# Altium PCB ADL5801.PcbDoc
Units mil, origin at the board's own origin, x right, y up, seen from the top; angles counter-clockwise.
Board outline 1370 x 1080 mil, 4 copper layers (Top Layer, Layer 1, Layer 2, Bottom Layer), stack 23.756 mil thick; 32 components, 21 nets, 114 pads, 117 vias.
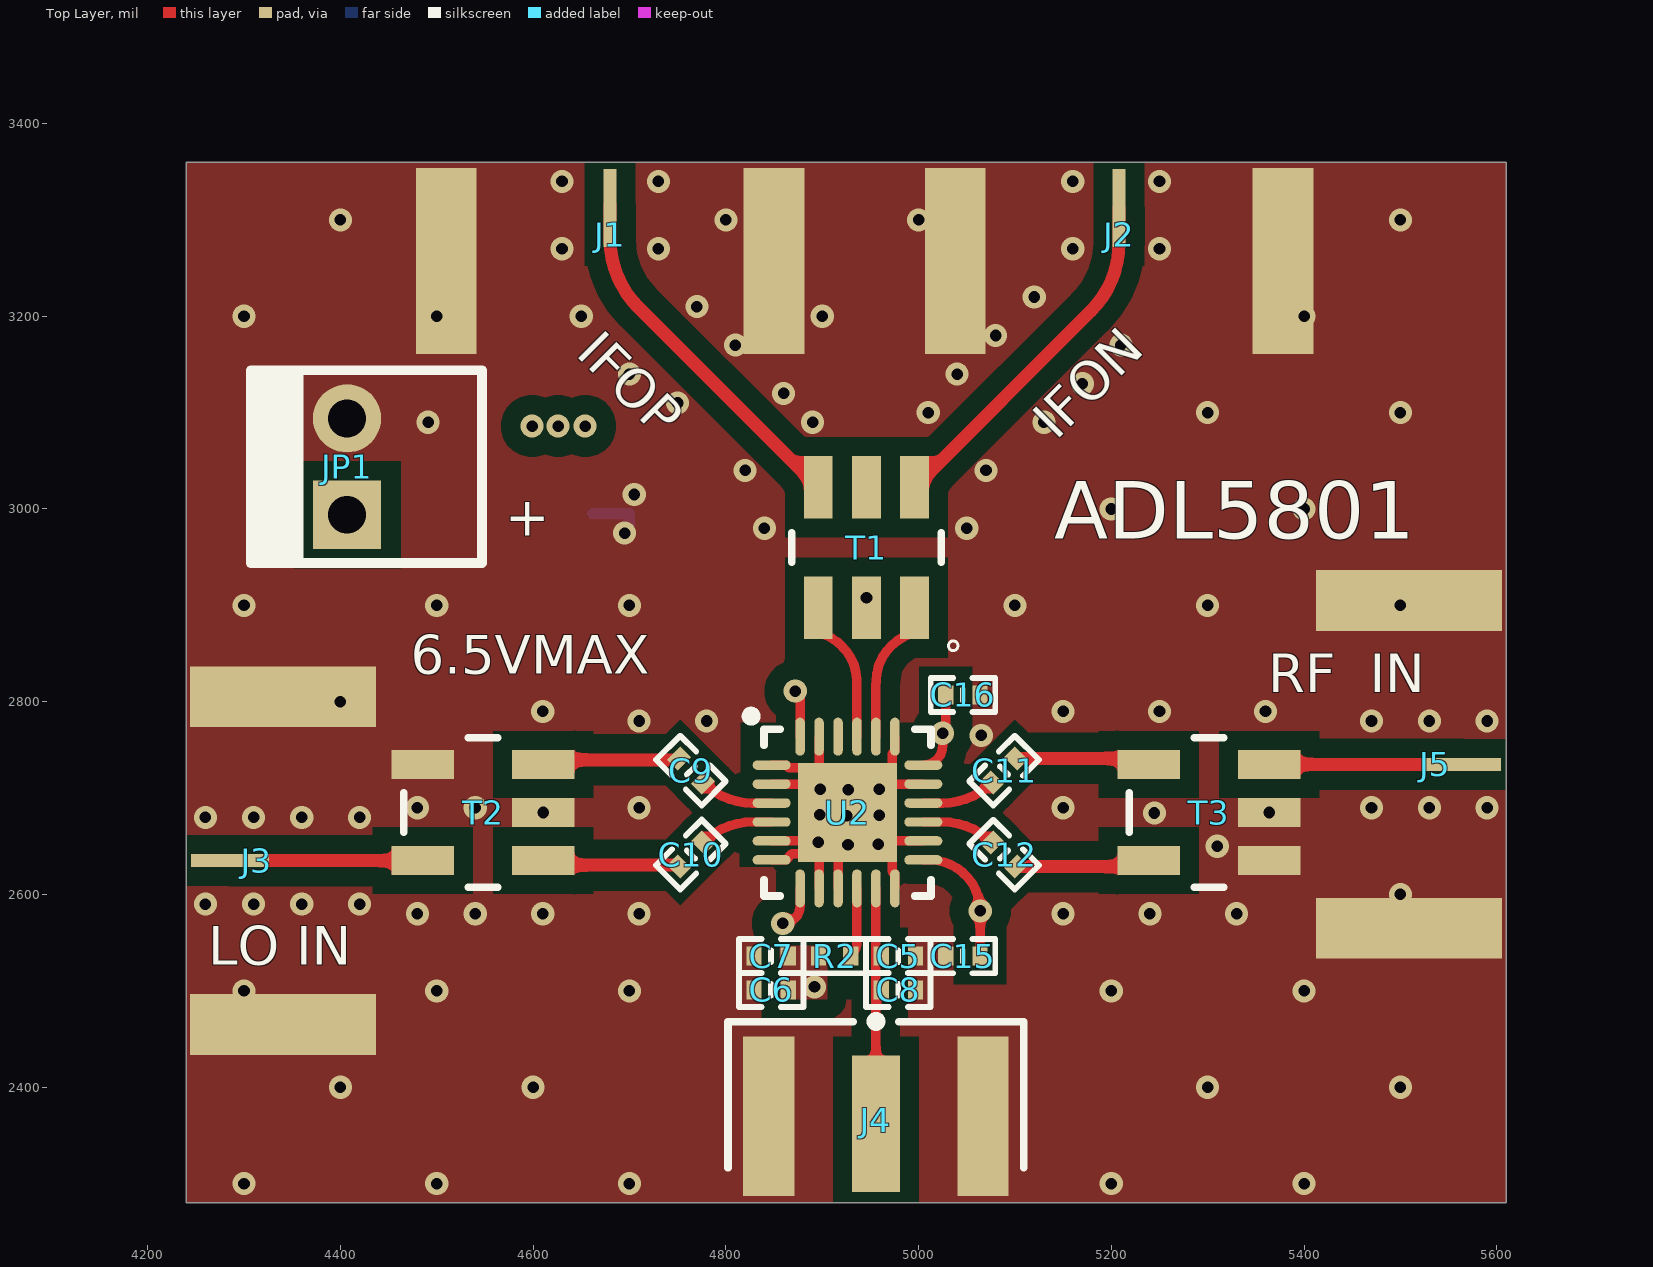
[diagram p0: Top Layer view]
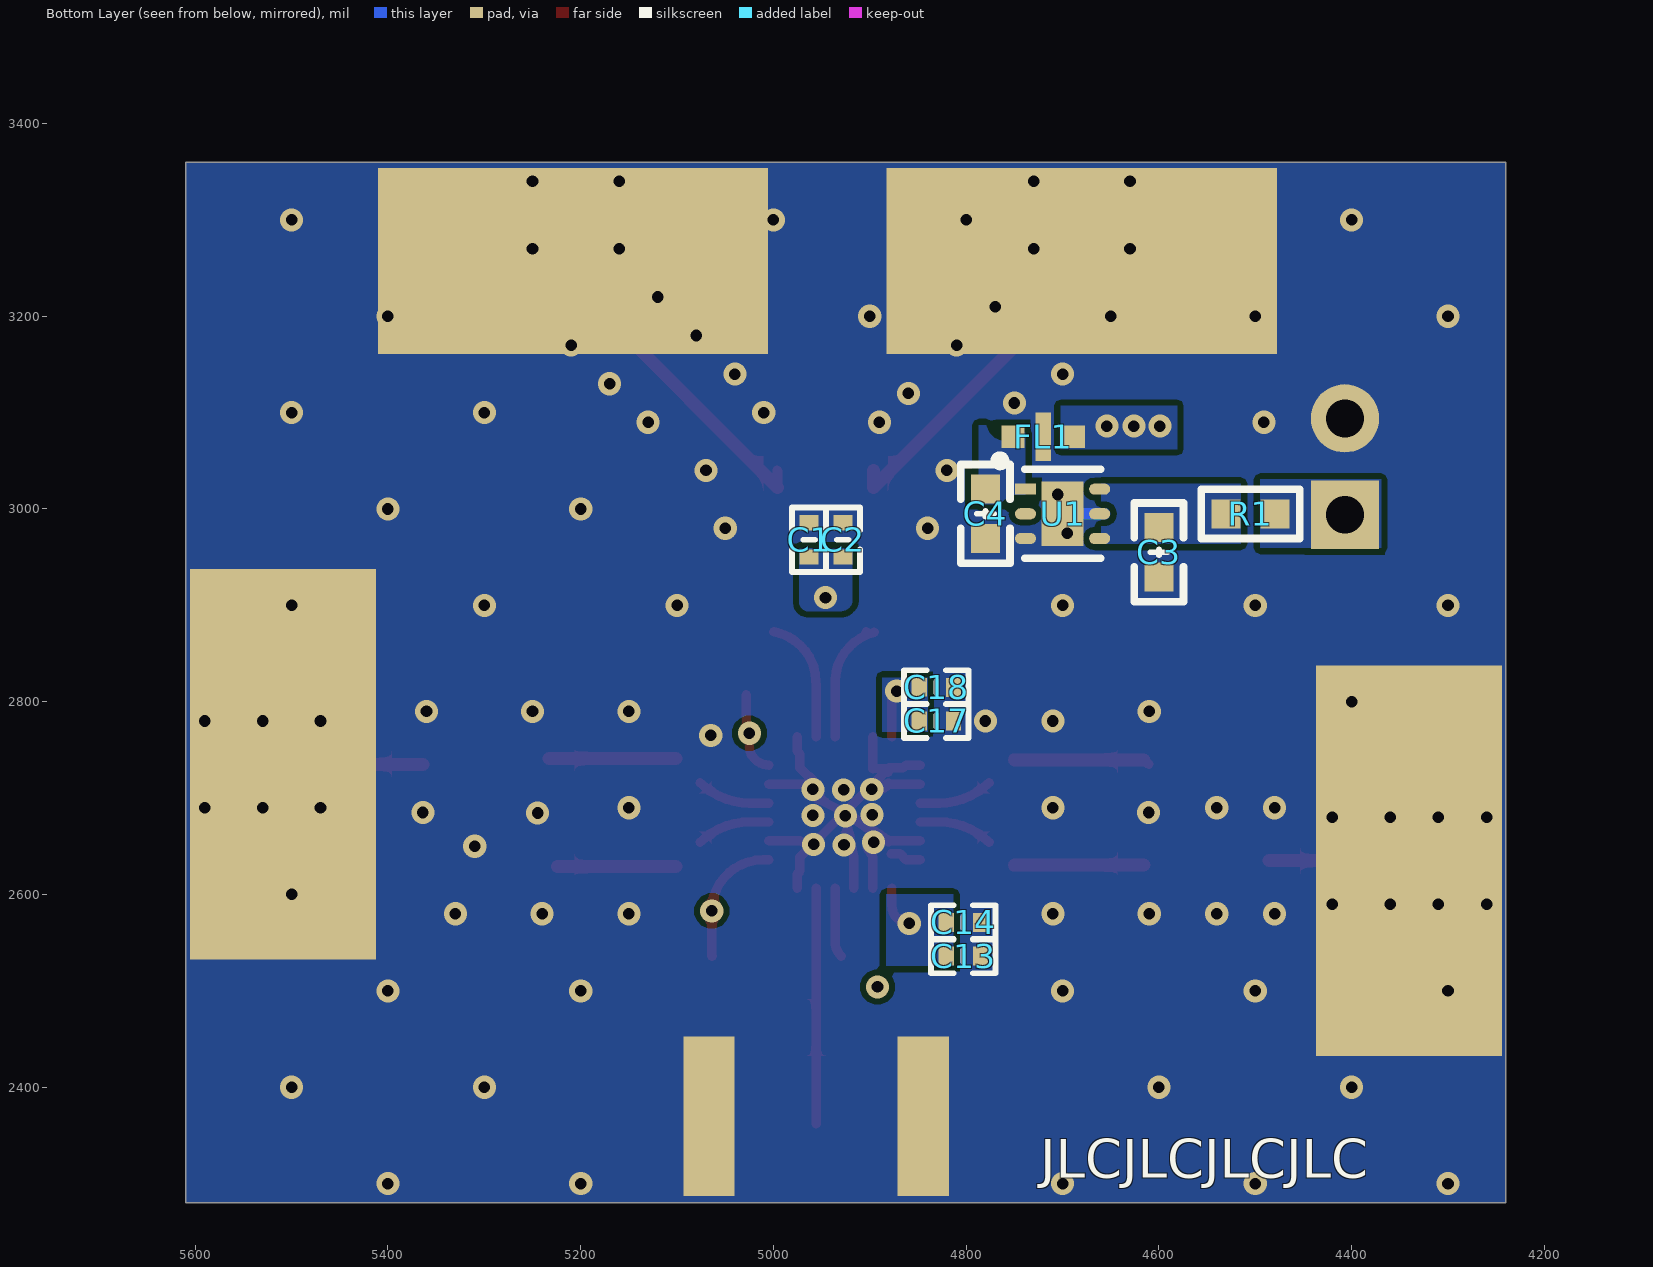
[diagram p1: Bottom Layer view, seen from below]
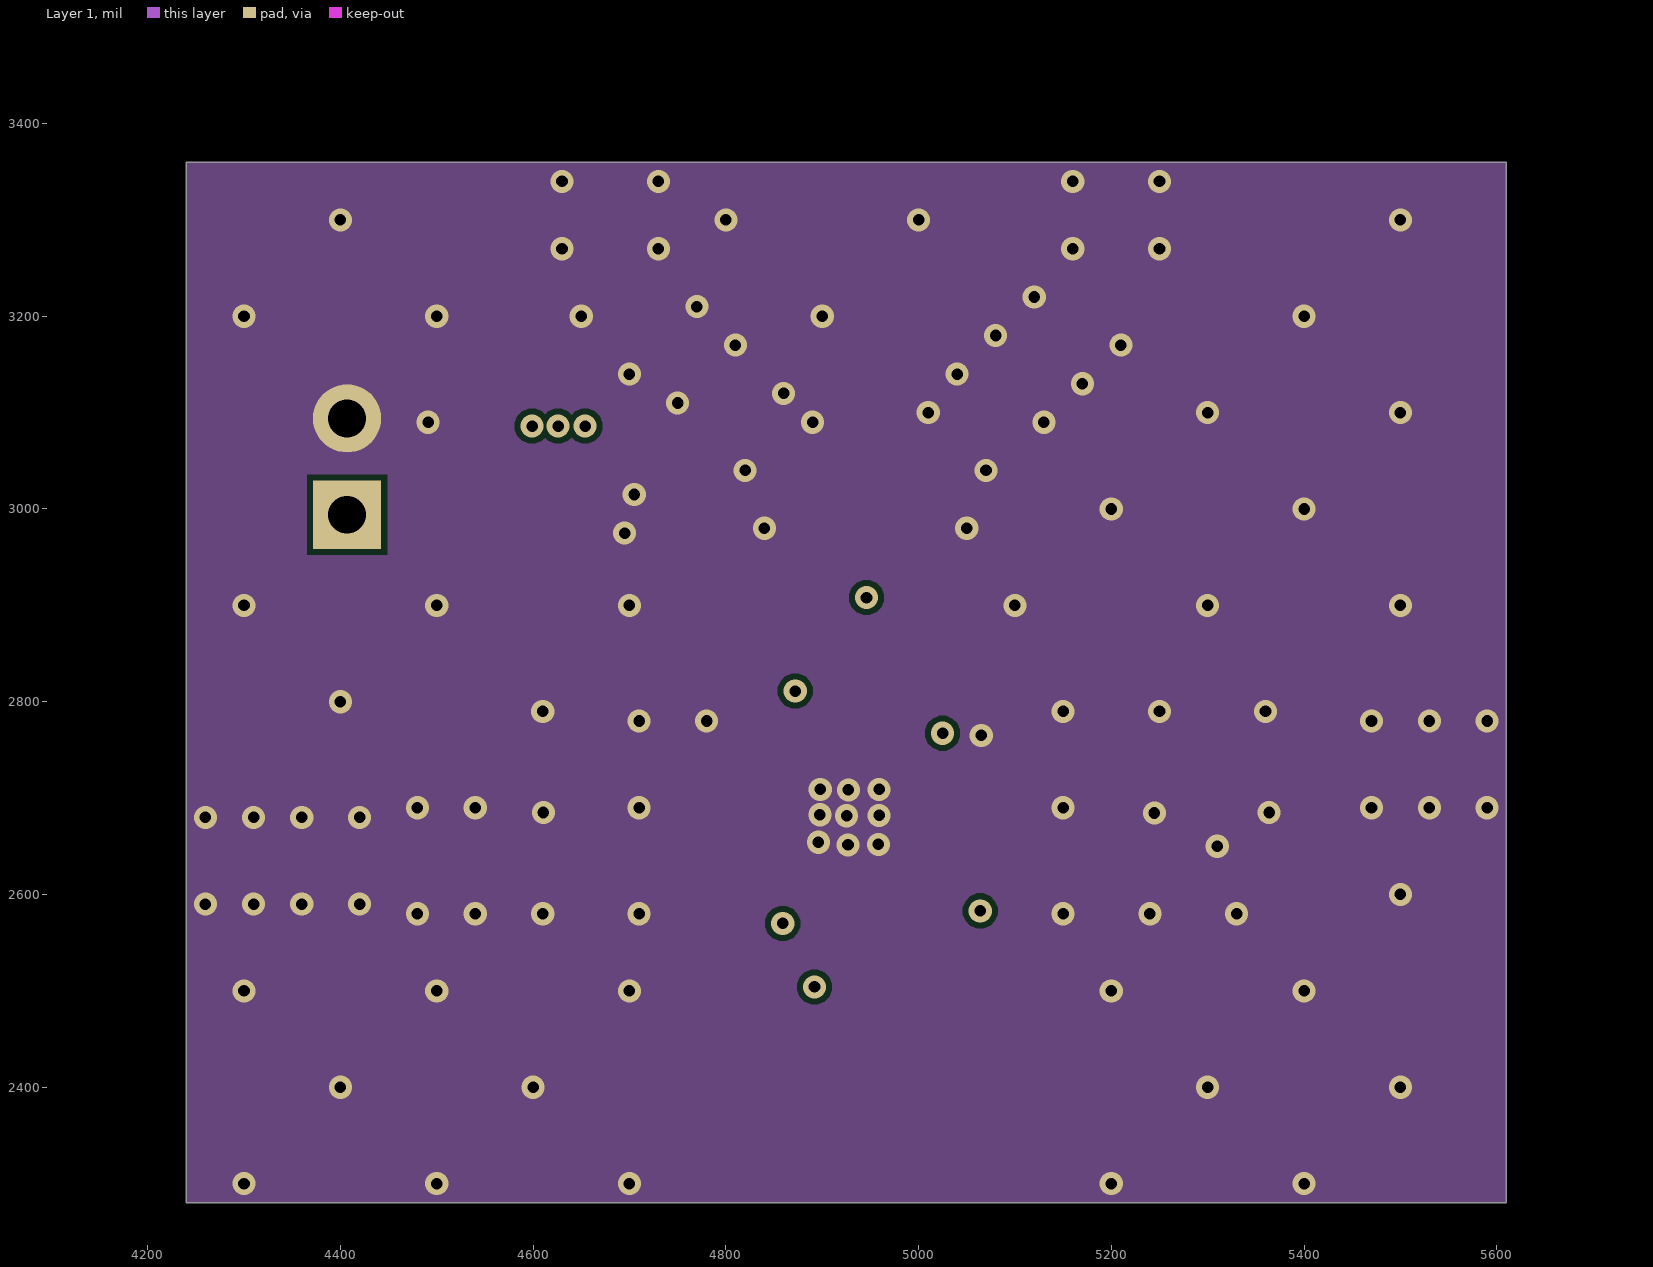
[diagram p2: Layer 1]
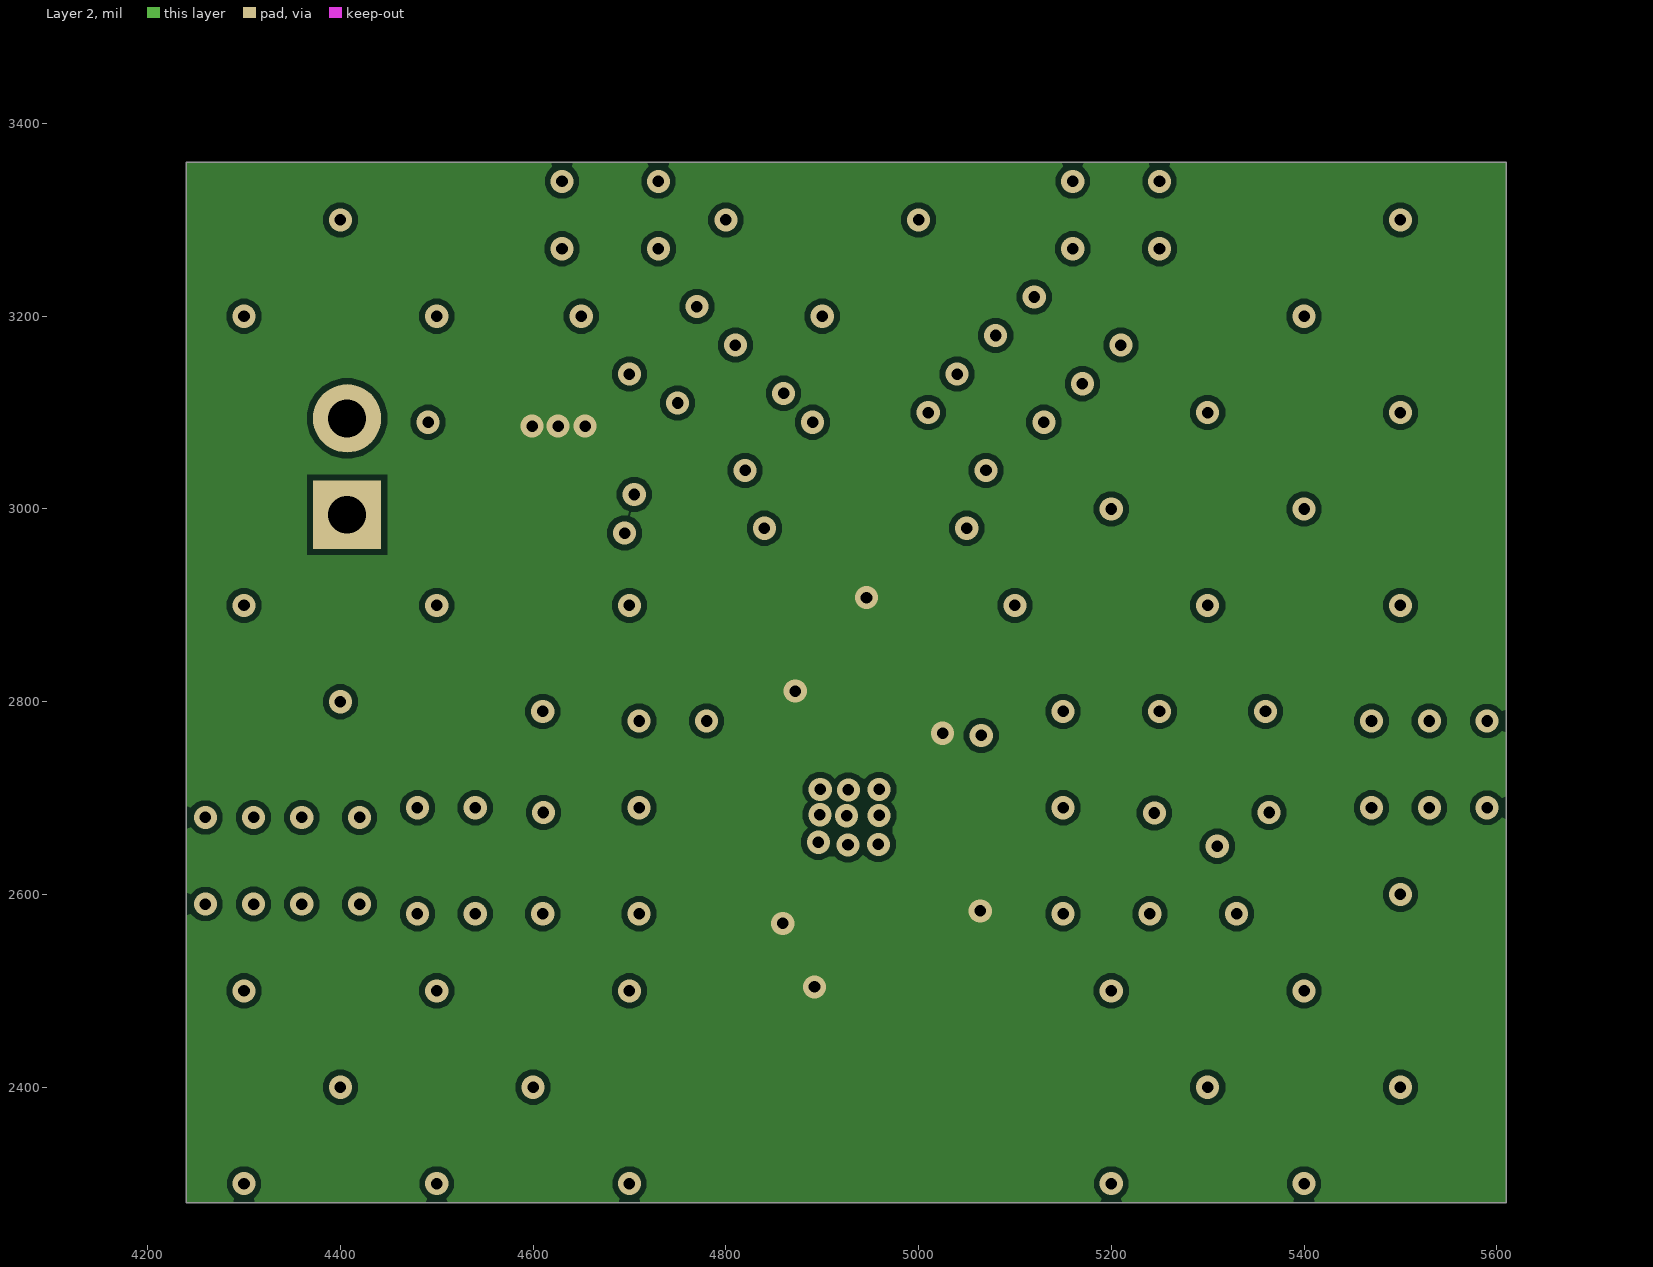
[diagram p3: Layer 2]
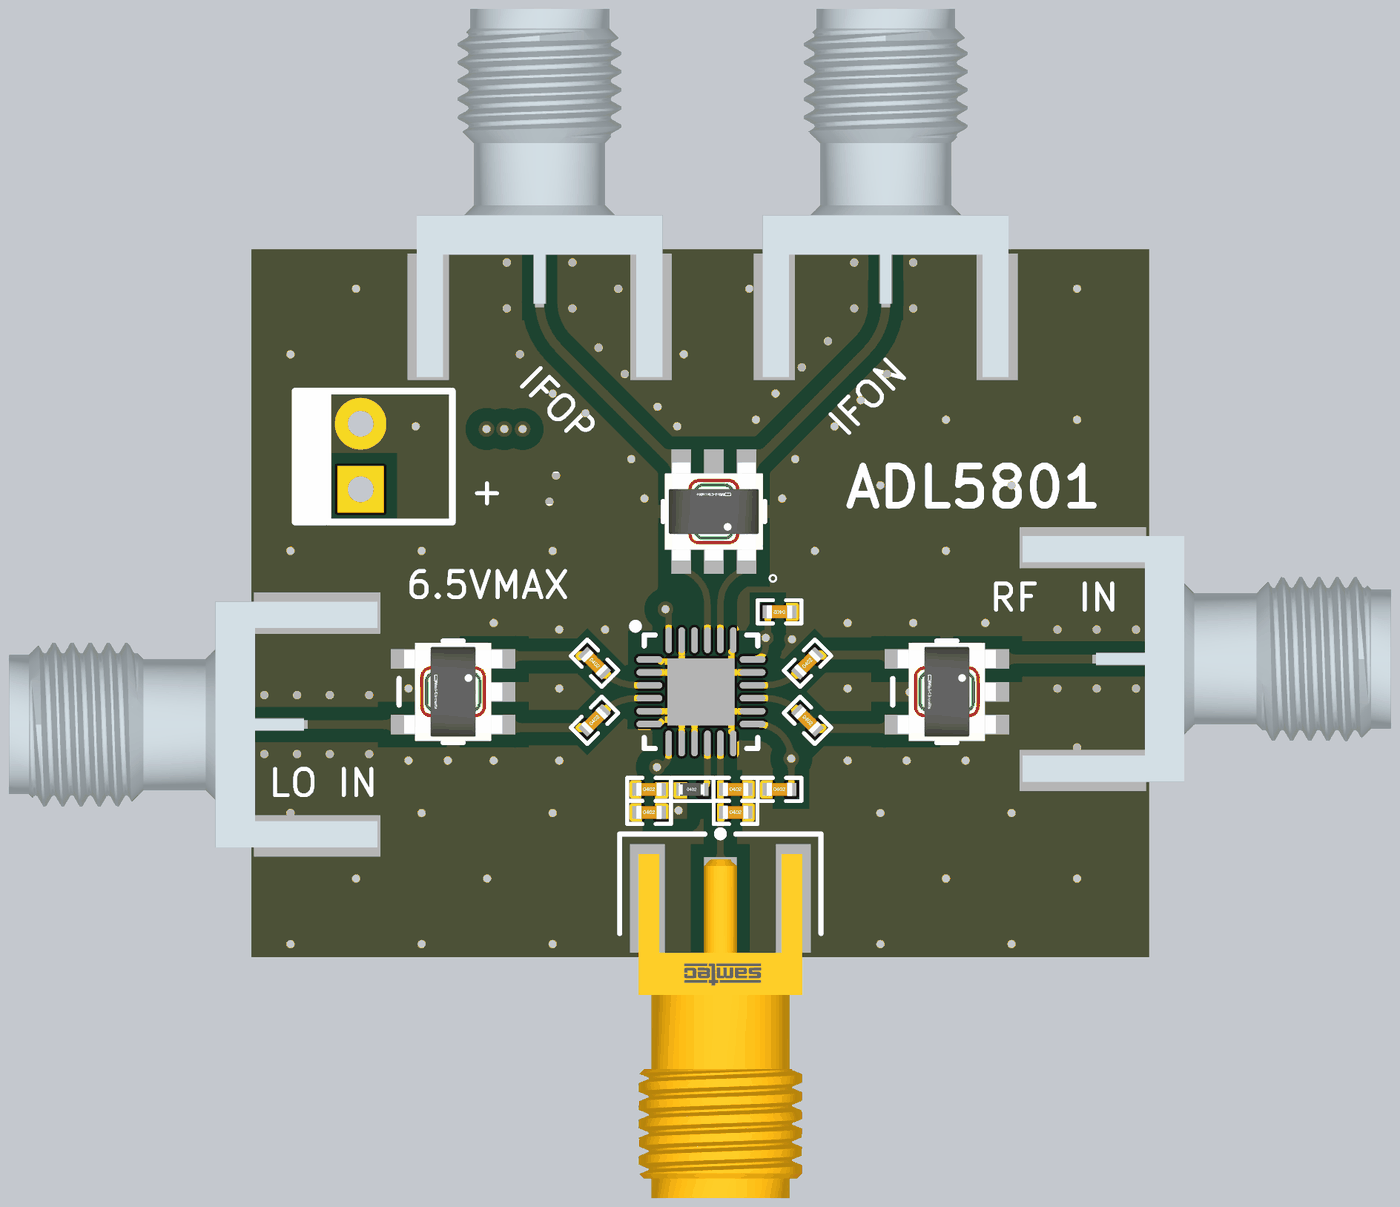
[diagram p4: 3D render of the assembled board from above, using the file's embedded part models]
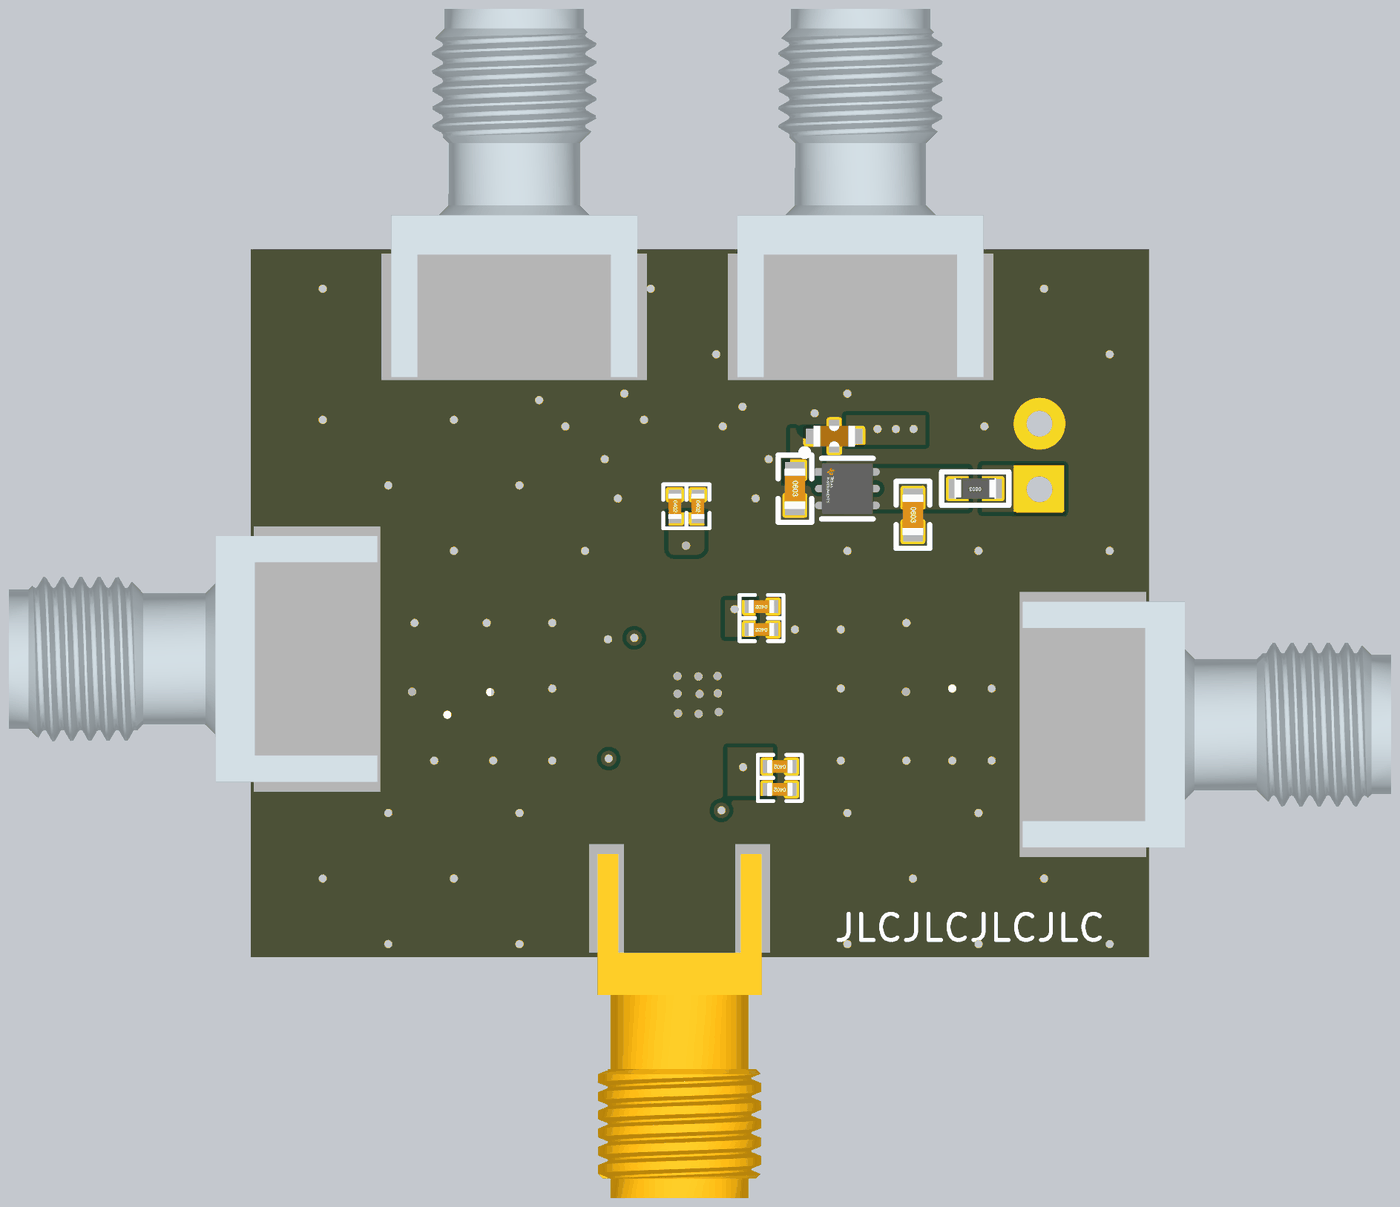
[diagram p5: 3D render of the assembled board from below, using the file's embedded part models]

## Layer stack, top to bottom
Top Solder: solder mask 0.4, Solder Resist, Dk 3.5
Top Layer: signal copper 1.4
Dielectric 2: prepreg 2.8, PP-006, Dk 4.1
Layer 1: signal copper 1.378
Dielectric 1: dielectric 12.6, FR-4, Dk 4.8
Layer 2: signal copper 1.378
Dielectric 3: prepreg 2.8, PP-006, Dk 4.1
Bottom Layer: signal copper 1.4
Bottom Solder: solder mask 0.4, Solder Resist, Dk 3.5

## Board outline
4240,2280 5610,2280 5610,3360 4240,3360

## Design rules (kind name [scope] priority, off if disabled: settings)
Clearance [All] p1: gap=6 ignorepadtopadclearanceinfootprint=TRUE
DiffPairsRouting [All] p1: maxlimit=10 minlimit=99999 mostfreqgap=10 toplayer_mingap=0 toplayer_minwidth=9.84 toplayer_maxwidth=15 toplayer_prefwidth=15 midlayer1_mingap=0 midlayer1_minwidth=9.84 midlayer1_maxwidth=15 midlayer1_prefwidth=15 midlayer2_mingap=0 midlayer2_minwidth=9.84 midlayer2_maxwidth=15 midlayer2_prefwidth=15 bottomlayer_mingap=0 bottomlayer_minwidth=9.84 bottomlayer_maxwidth=15 bottomlayer_prefwidth=15 maxuncoupledlength=500
PlaneConnect [All] p1: planeconnectstyle=Direct reliefexpansion=20 reliefentries=4 reliefconductorwidth=10 reliefairgap=10
PolygonConnect [All] p1: connectstyle=Direct reliefconductorwidth=10 reliefentries=4 polygonreliefangle="90 Angle" airgapwidth=10
RoutingVias [All] p1: holewidth=28 width=50 viastyle="Through Hole" minholewidth=28 minwidth=50 maxholewidth=28 maxwidth=50
SolderMaskExpansion [All] p1: expansion=4 istentingtop=FALSE
Width [All] p1: maxlimit=20 minlimit=9.85 preferedwidth=13.48
28 further rules are at their usual default settings.

## Classes and differential pairs
differential pair RFI: +RFI_P -RFI_N
differential pair LOI: +LOI_P -LOI_N
differential pair IFO: +IFO_P -IFO_N

## Components (designator, comment, footprint, x,y, rotation, side; value= is the part's Value field where it differs from the comment)
C1 "100nF" "C 0402_L" 4963,2968 r270 bottom
C2 "100pF" "C 0402_L" 4928,2968 r270 bottom
C3 "1uF" "C 0603_L" 4600,2955 r270 bottom
C4 "4.7uF" "C 0603_L" 4780,2995 r270 bottom
C5 "100nF" "C 0402_L" 4979,2536 r0 top
C6 "100nF" "C 0402_L" 4847,2501 r0 top
C7 "100pF" "C 0402_L" 4847,2536 r0 top
C8 "100pF" "C 0402_L" 4979,2501 r0 top
C9 "470pF" "C 0402_L" 4763.77,2728.61 r315 top
C10 "470pF" "C 0402_L" 4763.77,2641.45 r45 top
C11 "470pF" "C 0402_L" 5088.73,2728.61 r45 top
C12 "470pF" "C 0402_L" 5088.73,2641.44 r315 top
C13 "100nF" "C 0402_L" 4803,2536 r0 bottom
C14 "100pF" "C 0402_L" 4803,2571 r0 bottom
C15 "100nF" "C 0402_L" 5046,2536 r0 top
C16 "100nF" "C 0402_L" 5046,2807 r180 top
C17 "100nF" "C 0402_L" 4831,2780 r0 bottom
C18 "100pF" "C 0402_L" 4831,2814.99 r0 bottom
FL1 "NFM18CC223R1C3D" FIL_NFM18CC223R1C3D 4720,3075 r180 bottom (schematic designator FL?)
J1 "132414" CONN_132414_AMP 4680,3457.15 r0 top
J2 "132414" CONN_132414_AMP 5208.07,3457.16 r0 top
J3 "132414" CONN_132414_AMP 4140.65,2635.03 r90 top
J4 "SMA-J-P-H-ST-EM1" FP-SMA-J-P-H-ST-EM1-MFG 4955.78,2099.74 r0 top
J5 "132414" CONN_132414_AMP 5708.75,2735.03 r270 top
JP1 "HDR-1X2" KF2510-LI-2P 4407,3044 r90 top
R1 "120欧磁珠" "R 0603_L" 4505,2995 r0 bottom
R2 "560" "R 0402_L" 4912,2536 r0 top
T1 "TC4-1T+" TC4-1T+-Footprint-1 4945.94,2958.03 r180 top
T2 "TC1-1-13M+" FP-TC1-1-13M+-MFG 4548.15,2685.03 r270 top
T3 "TC1-1-13M+" FP-TC1-1-13M+-MFG 5301.25,2685.03 r270 top
U1 "LP5912-5.0DRVT" FP-DRV0006A-IPC_C 4700,2995 r180 bottom
U2 "ADL5801ACPZ-R7" ADI-CP-24-3_M 4926.25,2685.03 r0 top

## Footprints (in the part's own frame and the unit in brackets; to place one, negate y for a bottom-side part, rotate by r counter-clockwise, add the part's x,y. Pads: shape width x height; smd on the part's side, far side on the other; paste and mask are expansions set on the pad)
ADI-CP-24-3_M [mm] "QFN, 24-Leads, Body 4x4mm, Pitch 0.5mm, Thermal Pad 2.5x2.5mm, IPC Low Density"
  oval 1x0.25 smd: 1(-2,1.25) 2(-2,0.75) 3(-2,0.25) 4(-2,-0.25) 5(-2,-0.75) 6(-2,-1.25) 13(2,-1.25) 14(2,-0.75) 15(2,-0.25) 16(2,0.25) 17(2,0.75) 18(2,1.25)
  oval 0.25x1 smd: 7(-1.25,-2) 8(-0.75,-2) 9(-0.25,-2) 10(0.25,-2) 11(0.75,-2) 12(1.25,-2) 19(1.25,2) 20(0.75,2) 21(0.25,2) 22(-0.25,2) 23(-0.75,2) 24(-1.25,2)
  rect 2.6x2.6 smd: 25(0,0)
  silkscreen extent -2.66,-2.2 2.2,2.66, body extent -2.05,-2.05 2.05,2.05, height 1
"C 0402_L" [mm] "无极性贴片电容"
  rect 0.4x0.5 smd: 1(-0.45,0) 2(0.45,0)
  silkscreen extent -0.85,-0.45 0.85,0.45, body extent -0.5,-0.26 0.5,0.26, height 0.53
"C 0603_L" [mil] "无极性贴片电容"
  rect 30x30 smd: 1(-25.59,0) 2(25.59,0)
  silkscreen extent -51,-26 51,26, body extent -31,-16 31,16, height 32
CONN_132414_AMP [mil]
  rect 13.48x81 smd paste+0 mask+0: 1(0,-145)
  rect 63x193 smd mask+0: 2(-170,-200) 3(170,-200)
  rect 405x193 smd far side mask+0: 4(0,-200)
  body extent -188,-292 188,270, height 162
FIL_NFM18CC223R1C3D [mm]
  rect 0.6x0.6 smd: 1(-0.8,0) 3(0.8,0)
  rect 0.4x1.27 smd: 2(0,0)
  body extent -0.8,-0.4 0.8,0.4, height 0.7
FP-DRV0006A-IPC_C [mm]
  rect 0.556x0.292 smd paste+0 mask+0: 1(-0.978,0.65)
  rrect100% 0.556x0.292 smd paste+0 mask+0: 2(-0.978,0) 3(-0.978,-0.65) 4(0.978,-0.65) 5(0.978,0) 6(0.978,0.65)
  rect 1.1x1.7 smd paste-1000 mask+0: 7(0,0)
  silkscreen extent -1.78,-1.17 1,1.52, body extent -1,-1 1,1, height 0.8
FP-SMA-J-P-H-ST-EM1-MFG [mm]
  rect 1.27x3.6 smd paste+0 mask+0: 1(0,6.66)
  rect 1.35x4.2 smd paste+0 mask+0: 2(-2.825,6.86) 3(2.825,6.86)
  rect 1.35x4.2 smd far side paste+0 mask+0: 4(-2.825,6.86) 5(2.825,6.86)
  silkscreen extent -3.9,5.5 3.9,9.48, body extent -3.6,-4.92 3.6,9.06, height 0.25
FP-TC1-1-13M+-MFG [mil]
  rect 30x65 smd paste+0 mask+0: 1(-50,62.5) 2(0,62.5) 3(50,62.5) 4(50,-62.5) 6(-50,-62.5)
  silkscreen extent -78,-83 78,15, body extent -81,-99 81,99, height 10
KF2510-LI-2P [mm] "接插件/2A"
  rect 1.8x1.8 hole 1: 1(-1.27,0)
  round 1.8 hole 1: 2(1.27,0)
  silkscreen extent -2.59,-3.56 2.54,2.54, body extent -2.54,-3.5 2.54,2.4, height 11.05
"R 0402_L" [mm] "1/16W贴片电阻 https://item.taobao.com/item.htm?ft=t&id=613637044352"
  rect 0.4x0.5 smd: 1(-0.4,0) 2(0.45,0)
  silkscreen extent -0.8,-0.45 0.85,0.45, body extent -0.5,-0.25 0.5,0.25, height 0.3
"R 0603_L" [mil] "1/10W贴片电阻 https://item.taobao.com/item.htm?ft=t&id=613637044352"
  rect 30x30 smd: 1(-25.59,0) 2(25.59,0)
  silkscreen extent -51,-26 51,26, body extent -31,-16 31,16, height 16
TC4-1T+-Footprint-1 [mil]
  rect 30x65 smd paste+0 mask+0: 1(-50,60.5) 2(0,60.5) 3(50,60.5) 4(50,-64.5) 5(0,-64.5) 6(-50,-64.5)
  silkscreen extent -95,-17 78,105, body extent -81,-101 81,97, height 10

## Part data
C1 C2 C3 C4 C5 C6 C7 C8 C9 C10 C11 C12 C13 C14 C15 C16 C17 C18: library part C, "贴片电容", BOM名称=贴片电容, 下单链接=https://item.taobao.com/item.htm?ft=t&id=613637044352, 淘宝ID=小糖豆的小窝窝
FL1: "SMD Capacitor with Capacitance: 22000pF Tol. 20%. Rated Voltage: 16Vdc", Package=NONSTANDARD, Availability="In Stock", Check_prices=https://www.snapeda.com/parts/NFM18CC223R1C3D/Murata/view-part/?ref=eda, MF=Murata, MP=NFM18CC223R1C3D, Price=None, Purchase-URL=https://pricing.snapeda.com/search/part/NFM18CC223R1C3D/?ref=eda, SnapEDA_Link=https://www.snapeda.com/parts/NFM18CC223R1C3D/Murata/view-part/?ref=snap
J1 J2 J3 J5: "No Description Available", Mfr_Name="Amphenol ICC", Copyright="Copyright (C) 2022 Ultra Librarian. All rights reserved.", Manufacturer_Part_Number=132414, RefDes=RefDes, Type=DEV
J4: library part CMP-02754-000006-1, "CONN SMA JACK STR 50OHM EDGE MNT", Case/Package=SMA, Dielectric Material=PTFE, Housing Color=Gold, Max Frequency=6GHz, Max Operating Temperature=125°C, Min Operating Temperature=-65°C, Package Quantity=1, Voltage Rating=335V, Body Material=Brass, Body Plating=Gold, Center Contact Plating=Gold, Connector Type=SMA, Contact Material=Copper, Contact Plating=Gold, Depth=13.33mm, Fastening Type=Threaded, Impedance=50R, Insulation Material=Polytetrafluoroethylene, Length=6.35mm, Mount=Edge, Orientation=Straight, Packaging=Tray, Radiation Hardening=No, RoHS Compliant=Yes, Series=SMA, Termination=Solder
JP1: library part "Header 2", "2P接插件", BOM名称=2P接插件, 下单链接=https://item.taobao.com/item.htm?ft=t&id=613637044352, 淘宝ID=小糖豆的小窝窝
R1 R2: library part R, "贴片电阻", BOM名称=贴片电阻, 下单链接=https://item.taobao.com/item.htm?ft=t&id=613637044352, 淘宝ID=小糖豆的小窝窝
T1: "Xfmr, Isolation, 50 ohm, 4: 1, 0.5-300 MHz, SMT"
T2 T3: library part CMP-00025-00004-2, "RF Transformer 1: 1 5 Terminal SMD", RoHS Compliant=Yes
U1: library part CMP-019-00049-1, "Linear Voltage Regulator IC Positive Fixed 1 Output 5.0V 500mA 6-SON (2x2)", Case/Package=SON, Dropout Voltage=950mV, Max Operating Temperature=125°C, Min Operating Temperature=-40°C, Output Current=500mA, Output Voltage=5V, Mounting Technology="Surface Mount", Pins=6, RoHS Compliant=Yes
U2: library part CMP-00025-00005-1, "RF Mixer IC Cellular Up/Down Converter 10MHz ~ 6GHz 24-LFCSP-VQ (4x4)", Case/Package="LFCSP EP", Frequency=10MHz, Max Operating Temperature=85°C, Min Operating Temperature=-40°C, Pins=24, RoHS Compliant=Yes

## Via types
v1: diameter 24, hole 12, Top Layer to Bottom Layer, tented both sides, 117 vias

## Nets (pads, with @x,y where several pads share a name; then routed paths per layer and width w, separated by ;. In a path a pad name is that pad's centre, name@x,y a point inside that pad or via, vN(x,y) a via of type N, cw(c..) or ccw(c..) an arc to the next point about the centre after c; other vN are vias at no path point)
+5: C1.2 C2.2 C6.2 C7.2 C13.2 C14.2 C15.2 C16.2 C17.2 C18.2 FL1.3 R2.1 T1.2 U2.7 U2.13 U2.18 U2.24 | length 319.2
  Top Layer w9.85: v1(4859,2570) ccw(c4859,2588.04) 4877.04,2588.04 U2.7 ; v1(4872,2811) cw(c4872,2805.96) 4877.04,2805.96 U2.24 ; U2.13 5011.19,2635.81 cw(c5011.19,2583) v1(5064,2583) 5064,2536 C15.2 ; U2.18 ccw(c5004.99,2754.24) 5024.99,2754.24 v1(5024.99,2767.3) ccw(c5024.99,2770.59) 5028.29,2770.59 C16.2
  other v1: 4892,2504 4946,2908 4599,3086 4626,3086 4654,3086
DETO: C5.1 C8.1 J4.1 U2.11 | length 244.3
  Top Layer w9.85: J4.1 U2.11
GND: C1.1 C2.1 C3.2 C4.2 C5.2 C6.1 C7.1 C8.2 C13.1 C14.1 C15.1 C16.1 C17.1 C18.1 FL1.2 J1.2 J1.3 J1.4 J2.2 J2.3 J2.4 J3.2 J3.3 J3.4 J4.2 J4.3 J4.4 J4.5 J5.2 J5.3 J5.4 JP1.2 T2.2 T2.6 T3.2 T3.3 U1.3 U1.5 U1.7 U2.1 U2.2 U2.5 U2.6 U2.8 U2.9 U2.12 U2.14 U2.17 U2.19 U2.23 U2.25 | length 779.3
  Top Layer w9.85: U2.6 4862.27,2635.81 4868.85,2642.39 U2.25@4877.8,2642.39 ; U2.5 U2.25@4880.83,2655.5 ; U2.2 U2.25@4880.83,2714.55 ; U2.1 4862.27,2734.24 4865.23,2731.29 4879.99,2731.29 4881.05,2730.23 U2.25@4881.05,2726.87 ; U2.25@4881.27,2731.22 4896.72,2730.45 U2.23 ; U2.25@4882.73,2728.55 U2.25 U2.25@4961.83,2703.56 ; U2.8 4896.72,2638.77 U2.25@4902.51,2647.84 ; U2.9 4916.41,2638.77 U2.25@4919.53,2653.42 ; U2.25@4920.14,2656.32 U2.25@4925.3,2680.57 ; U2.25@4927.51,2683.77 4972.51,2638.77 4972.51,2624 4975.46,2621.05 U2.12 ; v1(4959,2709) 4964.55,2714.55 U2.17 ; U2.25@4961.7,2658.68 U2.25@4968.49,2653.64 ; U2.25@4963.14,2721.92 4972.51,2731.29 4972.51,2746.05 4975.46,2749.01 U2.19 ; U2.25@4972.51,2655.5 U2.14
  Top Layer w11.52: U2.25@4880.83,2655.5 4890.16,2661.57 4903.42,2670.19 4904.54,2670.92 4905.08,2671.27 U2.25@4924.05,2683.6 ; U2.25@4880.83,2714.55 U2.25@4895.44,2705.06 ; U2.25@4954.61,2713.39 U2.25@4963.14,2721.92
  Bottom Layer w11.52: U1.5 U1.7 4700,2980 v1(4695,2975)
  other v1: 4300,2300 4500,2300 4700,2300 5200,2300 5400,2300 4400,2400 4600,2400 5300,2400 5500,2400 4300,2500 4500,2500 4700,2500 5200,2500 5400,2500 4480,2580 4540,2580 4610,2580 4710,2580 5150,2580 5240,2580 5330,2580 4260,2590 4310,2590 4360,2590 4420,2590 5500,2600 5310,2650 4926.8,2651.37 4958.25,2651.99 4896.04,2654.15 4260,2680 4310,2680 4360,2680 4420,2680 4925.34,2681.61 4959,2682 4897.65,2682.71 5244.64,2684.49 4610.65,2685.03 5363.75,2685.03 4480,2690 4540,2690 4710,2690 5150,2690 5470,2690 5530,2690 5590,2690 4927.15,2708.43 4898,2709 5065,2765 4710,2780 4780,2780 5470,2780 5530,2780 5590,2780 4610,2790 5150,2790 5250,2790 5360,2790 4400,2800 4300,2900 4500,2900 4700,2900 5100,2900 5300,2900 5500,2900 4840,2980 5050,2980 5200,3000 5400,3000 4705,3015 4820,3040 5070,3040 4491,3090 4890,3090 5130,3090 5010,3100 5300,3100 5500,3100 4750,3110 4860,3120 5170,3130 4700,3140 5040,3140 4810,3170 5210,3170 5080,3180 4300,3200 4500,3200 4650,3200 4900,3200 5400,3200 4770,3210 5120,3220 4630,3270 4730,3270 5160,3270 5250,3270 4400,3300 4800,3300 5000,3300 5500,3300 4630,3340 4730,3340 5160,3340 5250,3340
IFO_N: T1.3 U2.21 | length 129.7
  Top Layer w9.84: T1.3@4895.51,2871.96 cw(c4881.63,2818.74) 4932.95,2838.53 cw(c4923.73,2835.08) 4933.23,2837.65 cw(c4852.24,2815.94) 4936.09,2815.94 U2.21 ; T1.3@4903.47,2872.74 ccw(c4912.9,2875.56) 4903.49,2872.67 T1.3@4904.2,2870.34
IFO_P: T1.1 U2.20 | length 130.4
  Top Layer w9.84: U2.20 4955.78,2815.94 cw(c5039.63,2815.94) 4958.19,2835.9 cw(c5039.63,2815.94) 4958.65,2837.68 cw(c4968.14,2835.08) 4958.94,2838.58 cw(c5010.24,2818.74) T1.1@4999.46,2872.68
LOI_N: C10.2 U2.4 | length 76.9
  Top Layer w9.84: C10.2 cw(c4827.51,2602.76) 4827.51,2675.18 U2.4
LOI_P: C9.2 U2.3 | length 76.9
  Top Layer w9.84: C9.2 ccw(c4827.51,2767.3) 4827.51,2694.87 U2.3
NetC3_1: C3.1 R1.2 U1.4 U1.6
NetC4_1: C4.1 FL1.1 U1.1
NetC9_1: C9.1 T2.1 | length 143.1
  Top Layer w9.85: T2.1 T2.1@4615.37,2739.75 ; C9.1@4749.86,2739.75 C9.1
  Top Layer w13.48: T2.1@4615.37,2739.75 C9.1@4749.86,2739.75
NetC10_1: C10.1 T2.3 | length 136.5
  Top Layer w9.85: C10.1@4749.85,2630.31 C10.1
  Top Layer w13.48: T2.3@4615.36,2630.31 C10.1@4749.85,2630.31
NetC11_2: C11.2 T3.6 | length 131.4
  Top Layer w13.48: C11.2 T3.6@5232.64,2741.13
NetC12_2: C12.2 T3.4 | length 122.7
  Top Layer w13.48: C12.2 T3.4@5224,2628.92
NetJ1_1: J1.1 T1.4 | length 396.1
  Top Layer w13.48: J1.1@4680,3315.97 4680,3279.89 ccw(c4780,3279.89) 4709.29,3209.18 T1.4 T1.4@4895.94,3040.03
NetJ2_1: J2.1 T1.6 | length 390.7
  Top Layer w9.85: T1.6 T1.6@4995.94,3040.03
  Top Layer w13.48: T1.6 5178.78,3205.37 ccw(c5108.07,3276.08) 5208.07,3276.08 J2.1
NetJ3_1: J3.1 T2.4 | length 200
  Top Layer w13.48: J3.1 T2.4
NetJ5_1: J5.1 T3.1 | length 200
  Top Layer w13.48: T3.1 J5.1
NetR2_2: R2.2 U2.10 | length 72
  Top Layer w9.85: R2.2 ccw(c4914.31,2551.4) 4936.09,2551.4 U2.10
RAW: JP1.1 R1.1
RFI_N: C12.1 U2.15 | length 76.9
  Top Layer w9.84: U2.15 5024.99,2675.18 cw(c5024.99,2602.76) C12.1
RFI_P: C11.1 U2.16 | length 76.9
  Top Layer w9.84: U2.16 5024.99,2694.87 ccw(c5024.99,2767.3) C11.1
pads on no net: T1.5 U1.2 U2.22

## Polygon pours and split planes (outlines as drawn)
GND on Bottom Layer "NONET_L-01_P-001" (solid, remove dead copper, pour order 14): 4240,3360 5610,3360 5610,2280 4240,2280
+5 on Bottom Layer "NONET_L-01_P-001" (solid, remove dead copper, pour order 10): 4973,2959 4973,2903 cw(c4964,2903) 4964,2894 4931,2894 cw(c4930.45,2907.1) 4918,2903 4918,2959
+5 on Bottom Layer "NONET_L-01_P-001" (solid, remove dead copper, pour order 8): 4840,2825 4840,2769 4887,2769 4887,2825
+5 on Bottom Layer "NONET_L-01_P-001" (solid, remove dead copper, pour order 7): 4812,2526 4812,2600 4883,2600 4883,2526
+5 on Bottom Layer "NONET_L-01_P-001" (solid, remove dead copper, pour order 3): 4702,3062 4581,3062 4581,3107 4702,3107
NetC4_1 on Bottom Layer "NONET_L-01_P-001" (solid, remove dead copper, pour order 2): 4738.51,3030 4738.51,3015 4755,3015 4765,3005 4787,3005 4787,3087 4738.51,3087
RAW on Bottom Layer "NONET_L-01_P-001" (solid, remove dead copper, pour order 0): 4369.49,3030.61 4369.49,2959.62 4495,2959.62 4495,3030.61
NetC3_1 on Bottom Layer "NONET_L-01_P-001" (solid, remove dead copper, pour order 1): 4660,3026.31 4660,2963.66 4515,2963.66 4515,3026.31
GND on Top Layer "NONET_L-01_P-001" (solid, remove dead copper, pour order 11): 4240,3360 5610,3360 5610,2280 4240,2280
+5 on Top Layer "NONET_L-01_P-001" (solid, remove dead copper, pour order 5): 4856,2547 4856,2491 4905,2491 4905,2547
GND on Layer 1 "NONET_L-01_P-001" (solid, remove dead copper, pour order 12): 4240,3360 5610,3360 5610,2280 4240,2280
+5 on Layer 2 "NONET_L-01_P-001" (solid, remove dead copper, pour order 13): 4240,3360 5610,3360 5610,2280 4240,2280

## Other copper
Top Layer:
  pour cut-out: 4814,2704.89 4814,2628 5036.75,2628 5036.75,2705.5
  pour cut-out: 4815,2778.53 4815,2705.11 5031.16,2705.11 5030.64,2778.53
  pour cut-out: 4887,2638.77 4887,2565 4925,2565 4925,2638.77

## Silkscreen, mask and mechanical layers (free items; w line width, h text height)
Top Overlay:
  text "IFOP" at 4643.49,3160 h40 r315
  text "IFON" at 5143,3070.49 h40 r45
  text "+" at 4571,2972.34 h40
  text "ADL5801" at 5141,2969 h60
  text "6.5VMAX" at 4473,2829 h40
  text "RF  IN" at 5363,2810 h40
  text "LO IN" at 4263,2527 h40
Bottom Overlay:
  text "JLCJLCJLCJLC" at 4723,2306 h40
Mechanical 1:
  the board outline again, w6